# Altium PCB TYPEC_16P_SMD.pcbdoc
Units mm, origin at the board's own origin, x right, y up, seen from the top; angles counter-clockwise.
Board outline 22.85 x 20.63 mm, 2 copper layers (Top Layer, Bottom Layer); 1 components, 0 nets, 16 pads, 0 vias.
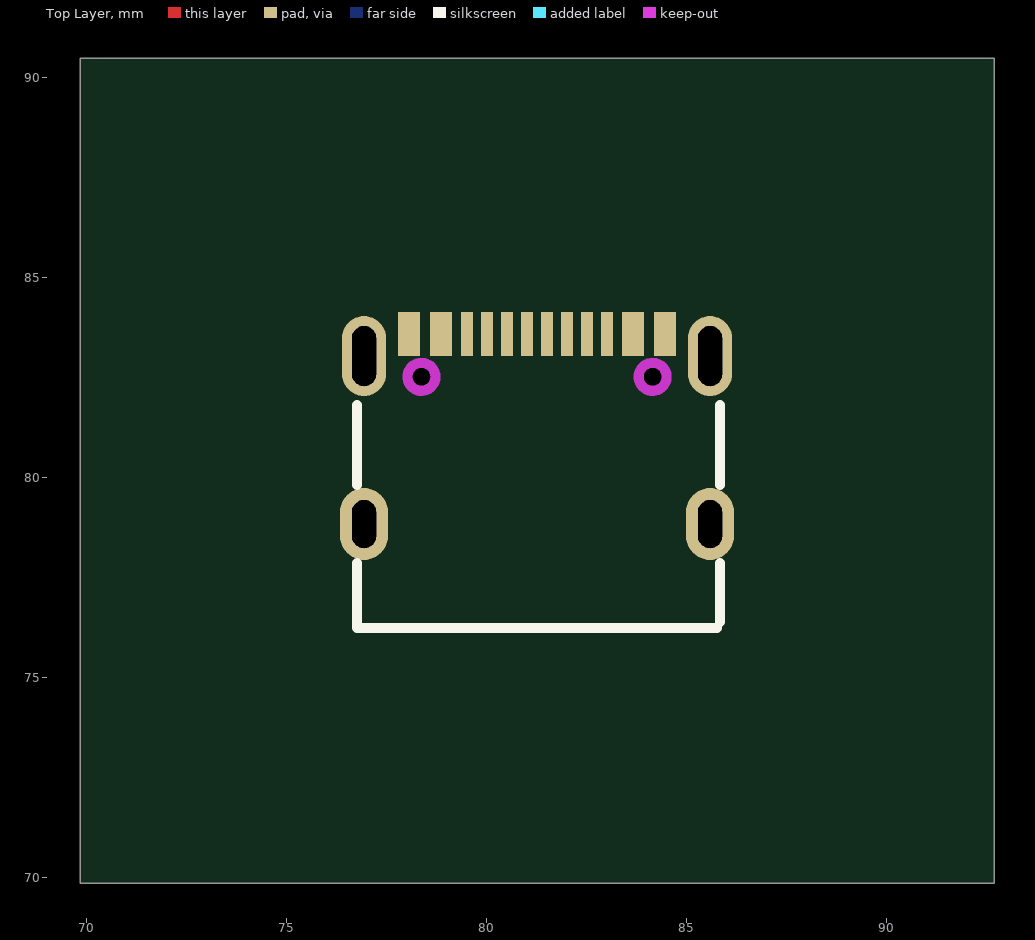
[diagram p0: Top Layer view]
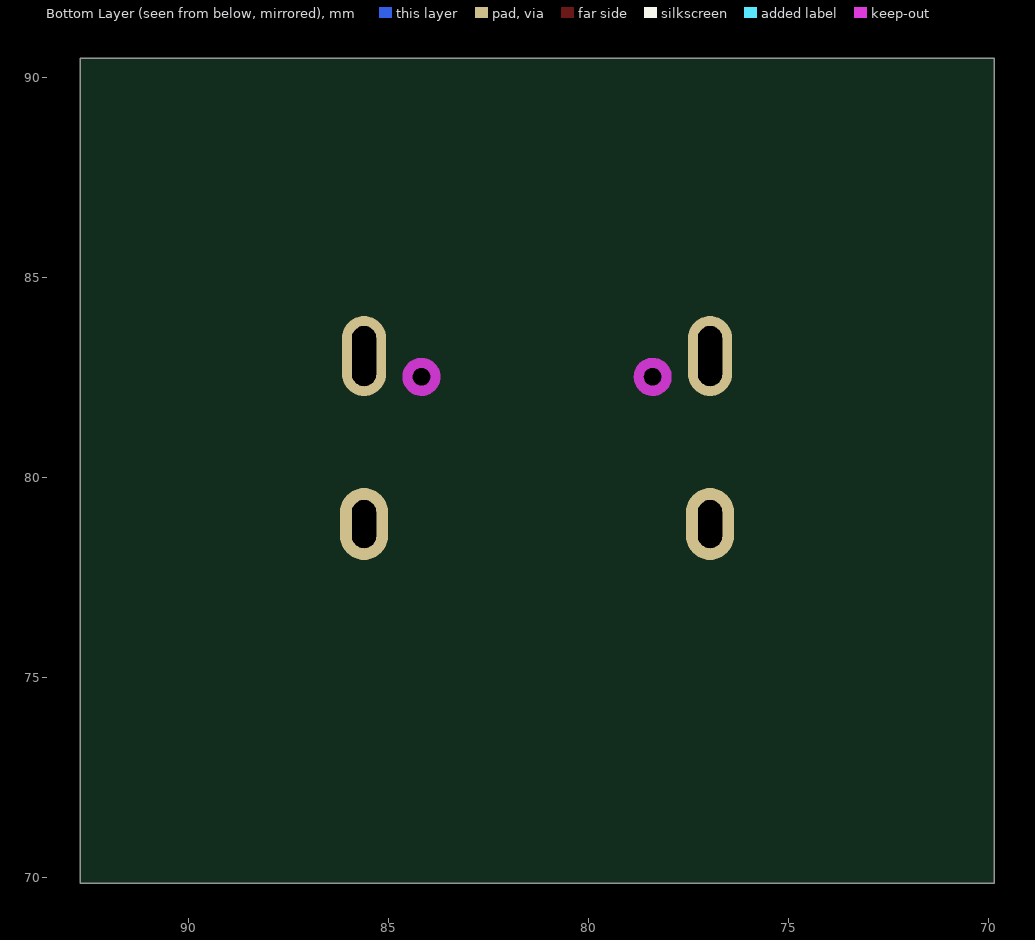
[diagram p1: Bottom Layer view, seen from below]

## Layer stack, top to bottom
Top Layer: signal copper (thickness not stored)
Dielectric: dielectric 0.32, FR-4, Dk 4.8
Bottom Layer: signal copper (thickness not stored)

## Board outline
92.7,69.85 69.85,69.85 69.85,90.476 92.7,90.476

## Components (designator, comment, footprint, x,y, rotation, side; value= is the part's Value field where it differs from the comment)
? "USB-C-SMD_TYPE-C-6PIN-2MD-073" USB-C-SMD_TYPE-C-6PIN-2MD-073 81.275,81.201 r0 top

## Footprints (in the part's own frame and the unit in brackets; to place one, negate y for a bottom-side part, rotate by r counter-clockwise, add the part's x,y. Pads: shape width x height; smd on the part's side, far side on the other; paste and mask are expansions set on the pad)
USB-C-SMD_TYPE-C-6PIN-2MD-073 [mm]
  rect 0.55x1.1 smd: 1(-3.2,2.375) 2(-2.4,2.375) 11(2.4,2.375) 12(3.2,2.375)
  rect 0.3x1.1 smd: 3(-1.75,2.375) 4(-1.25,2.375) 5(-0.75,2.375) 6(-0.25,2.375) 7(0.25,2.375) 8(0.75,2.375) 9(1.25,2.375) 10(1.75,2.375)
  oval 1.1x2 hole 0.6 slot 1.5 at 90 deg: 13(-4.325,1.825) 14(4.325,1.825)
  oval 1.2x1.8 hole 0.6 slot 1.2 at 90 deg: 13(-4.325,-2.375) 14(4.325,-2.375)
  Multi-Layer board cut-out: -2.54,1.305 -2.589,1.477 -2.717,1.603 -2.89,1.649 -3.063,1.603 -3.191,1.477 -3.24,1.305 -3.24,1.305 -3.191,1.133 -3.063,1.007 -2.89,0.961 -2.717,1.007 -2.589,1.133 -2.54,1.305
  Multi-Layer board cut-out: 3.24,1.305 3.191,1.477 3.063,1.603 2.89,1.649 2.717,1.603 2.589,1.477 2.54,1.305 2.54,1.305 2.589,1.133 2.717,1.007 2.89,0.961 3.063,1.007 3.191,1.133 3.24,1.305
  silkscreen extent -4.5,-4.97 4.57,0.6

## Nets (pads, with @x,y where several pads share a name; then routed paths per layer and width w, separated by ;. In a path a pad name is that pad's centre, name@x,y a point inside that pad or via, vN(x,y) a via of type N, cw(c..) or ccw(c..) an arc to the next point about the centre after c; other vN are vias at no path point)
pads on no net: ?.1 ?.2 ?.3 ?.4 ?.5 ?.6 ?.7 ?.8 ?.9 ?.10 ?.11 ?.12 ?.13 ?.14

## Keep-outs
Multi-Layer:
  circle w0.254: c78.385,82.506 r0.35
  circle w0.254: c84.165,82.506 r0.35